# EAGLE board Fantastic Wolt-Tumelo (EAGLE 9.7.0)

Size 220.38 x 188.99 mm. Coordinates in mm from the lower left corner, seen from the top.
Outline: 0,0 220.38,0 220.38,188.99 0,188.99 0,0
Copper layers (1*16): Top 0.035mm / dielectric 1.5mm / Bottom 0.035mm
Design rules "default": minimum track width 6mil, minimum drill 0.35mm, track to track 6mil, track to pad 6mil, pad to pad 6mil, via to via 6mil, smd to smd 6mil, copper to edge 40mil, drill to drill 6mil, minimum pad ring 10mil, minimum via ring 8mil, stop-mask expansion 4mil, vias tented up to drill 0mil, thermal gap 10mil

## Footprints (pad centres in the part's own frame; a part is rotated, then mirrored left to right if it is on the bottom)
28027 = drill 1.016 long: 1 -2.54,0; 2 0,0; 3 2.54,0
RESAD1016W63L850D250B = drill 0.83 pad 1.43: 1 -5.08,0; 2 5.08,0
HA-06-SM065 = drill 1 pad 1.676: 1 -2.54,-2.54; 2 0,2.54; 3 2.54,-2.54
SG90 = drill 1.016 long: 1 -2.54,0; 2 0,0; 3 2.54,0
ARDUINO-UNO-R3-SHIELD = drill 1.016 pad 1.88: 3.3V 24.13,-2.54; 5V 24.13,0; A0 24.13,12.7; A1 24.13,15.24; A2 24.13,17.78; A3 24.13,20.32; A4 24.13,22.86; A5 24.13,25.4; AREF -24.13,-13.97; D2 -24.13,20.32; D3 -24.13,17.78; D4 -24.13,15.24; D5 -24.13,12.7; D6 -24.13,10.16; D7 -24.13,7.62; D8 -24.13,3.81; D9 -24.13,1.27; D10 -24.13,-1.27; D11 -24.13,-3.81; D12 -24.13,-6.35; D13 -24.13,-8.89; GND@0 24.13,2.54; GND@1 24.13,5.08; GND@2 -24.13,-11.43; IOREF 24.13,-7.62; NC 24.13,-10.16; RES 24.13,-5.08; RX -24.13,25.4; SCL -24.13,-19.05; SDA -24.13,-16.51; TX -24.13,22.86; VIN 24.13,7.62
JHD-162A = drill 1.016 long: 1 -19.05,0; 2 -16.51,0; 3 -13.97,0; 4 -11.43,0; 5 -8.89,0; 6 -6.35,0; 7 -3.81,0; 8 -1.27,0; 9 1.27,0; 10 3.81,0; 11 6.35,0; 12 8.89,0; 13 11.43,0; 14 13.97,0; 15 16.51,0; 16 19.05,0

## Placement (x,y rotation side)
PIR1  PIR-SENSOR_28027  [28027]  178.5,32.5 180 top
PIR2  PIR-SENSOR_28027  [28027]  125.16,40.12 180 top
PIR3  PIR-SENSOR_28027  [28027]  84.52,40.12 180 top
PIR4  PIR-SENSOR_28027  [28027]  20.95,6.35 180 top
R1  220  [RESAD1016W63L850D250B]  161.04,180.02 270 top
RPOT3  250k  [HA-06-SM065]  120.4,159.7 0 top
SERVO2  SERVOSG90  [SG90]  213.4,43.41 0 top
SERVO3  SERVOSG90  [SG90]  47.15,23.4 0 top
U4  ARDUINO-UNO-R3-SHIELD  [ARDUINO-UNO-R3-SHIELD]  59.99,157.28 270 top
U5  LCD-16X2JHD-162A  [JHD-162A]  141.99,131.88 0 top

## Library data of the parts
PIR1-PIR4 R1 RPOT3 SERVO2 SERVO3 U4 U5 = Tinkercad

## Nets
PIR3_VCC: PIR1.2 PIR2.2 PIR3.2 PIR4.2 SERVO2.2 SERVO3.2
U4_D2: U4.D2 U5.14
U4_D3: U4.D3 U5.13
U4_D4: U4.D4 U5.12
U4_D5: U4.D5 U5.11
U4_D6: PIR4.1 U4.D6
U4_D7: PIR3.1 U4.D7
U4_D8: PIR2.1 U4.D8
U4_D9: SERVO2.3 U4.D9
U4_D10: SERVO3.3 U4.D10
U4_D11: U4.D11 U5.6
U4_D12: U4.D12 U5.4
U4_D13: PIR1.1 U4.D13
U4_GND: PIR1.3 PIR2.3 PIR3.3 PIR4.3 R1.1 RPOT3.1 RPOT3.3 SERVO2.1 SERVO3.1 U4.5V U4.GND@0 U4.GND@1 U4.GND@2 U5.1 U5.2 U5.5 U5.16
U5_LED+: R1.2 U5.15
U5_VO: RPOT3.2 U5.3

## Tracks (layer width: path | path; a pad name or v marks a point on that pad's centre or on a via)
PIR3_VCC  (5 unrouted)
U4_D2  (1 unrouted)
U4_D3  (1 unrouted)
U4_D4  (1 unrouted)
U4_D5  (1 unrouted)
U4_D6  (1 unrouted)
U4_D7  (1 unrouted)
U4_D8  (1 unrouted)
U4_D9  (1 unrouted)
U4_D10  (1 unrouted)
U4_D11  (1 unrouted)
U4_D12  (1 unrouted)
U4_D13  (1 unrouted)
U4_GND  (16 unrouted)
U5_LED+  (1 unrouted)
U5_VO  (1 unrouted)